# EAGLE board music bord (EAGLE 9.6.2)
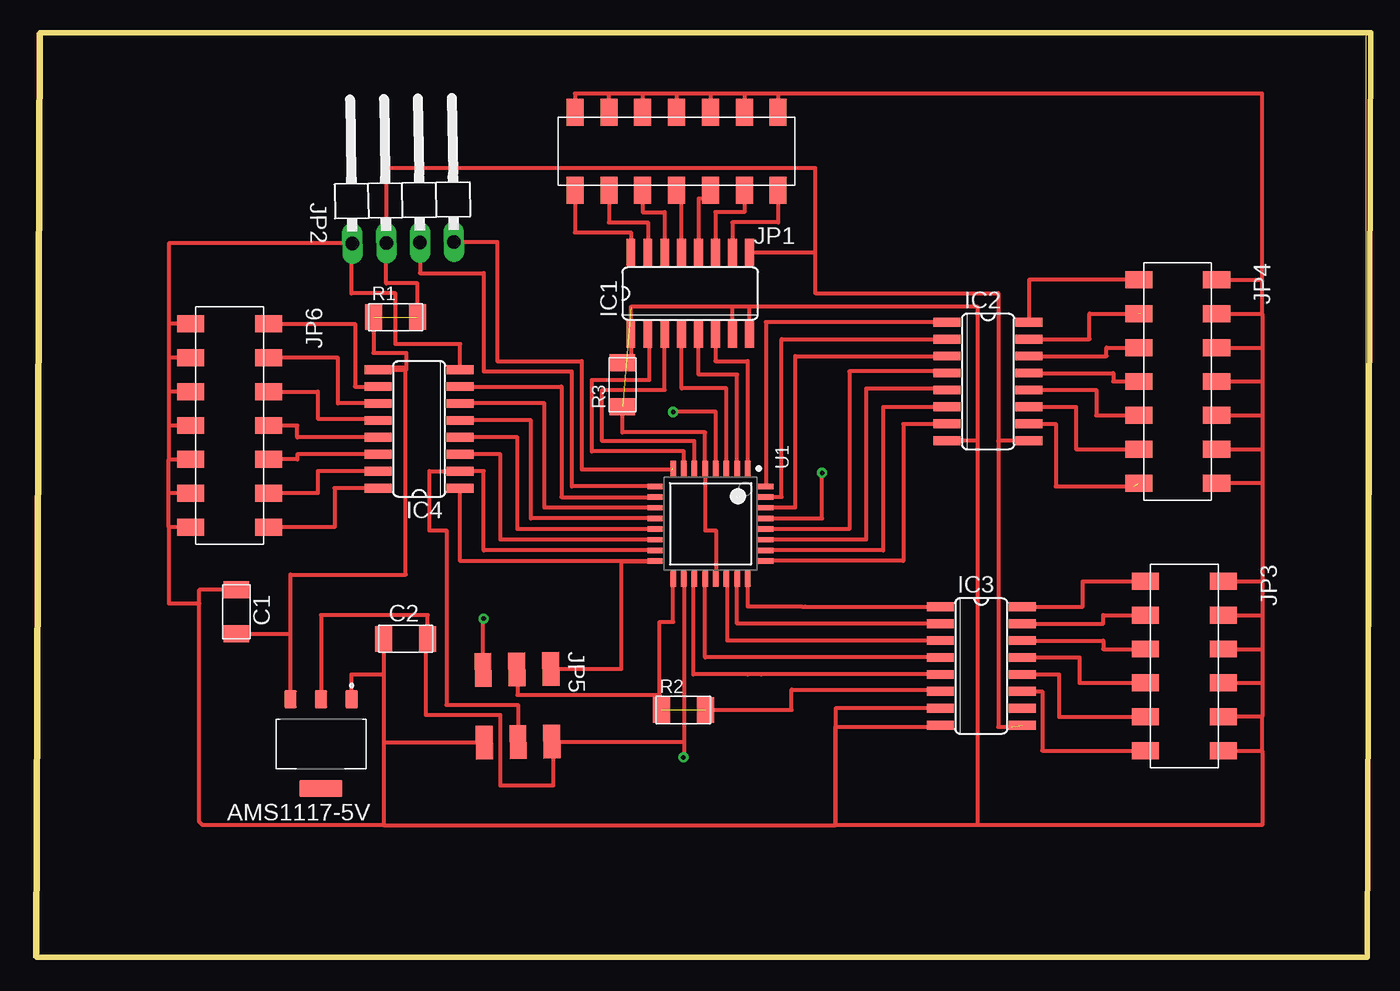
[diagram p0: board, top side]
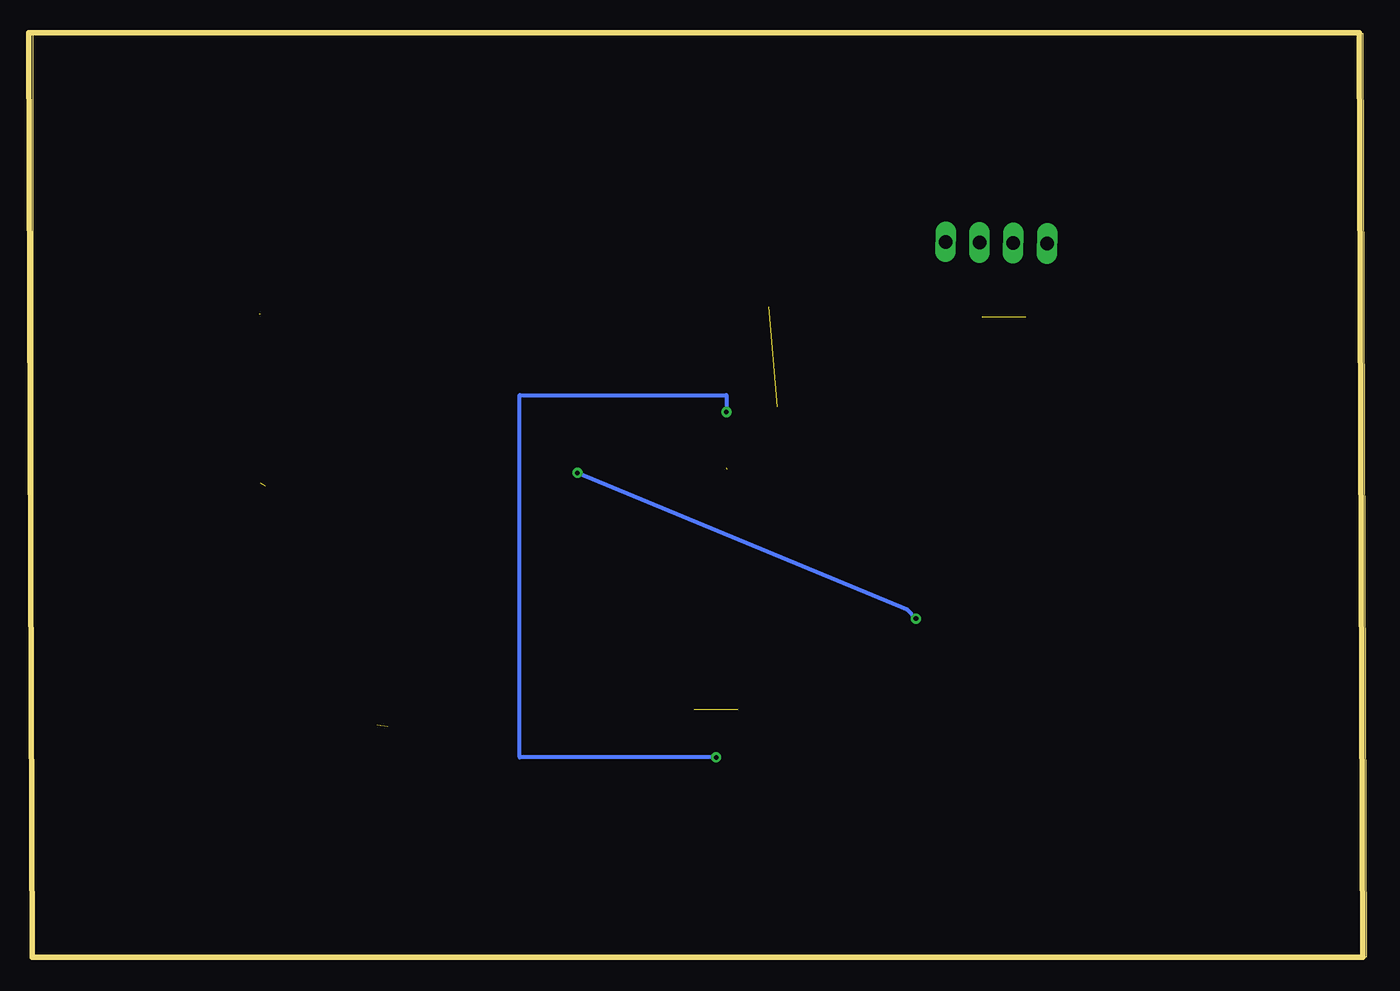
[diagram p1: board, bottom side, seen from below]

Size 100 x 69.29 mm. Coordinates in mm from the lower left corner, seen from the top.
Outline: 0,0 100,0 100,69.29 0.25,69.29 0,0
Copper layers (1*16): Top 0.035mm / dielectric 1.5mm / Bottom 0.035mm
Design rules "default *": minimum track width 12mil, minimum drill 0.35mm, track to track 12mil, track to pad 12mil, pad to pad 12mil, via to via 12mil, smd to smd 6mil, copper to edge 40mil, drill to drill 6mil, minimum pad ring 10mil, minimum via ring 8mil, stop-mask expansion 4mil, vias tented up to drill 0mil, thermal gap 10mil
Net classes: 0 default: clearance 0.205 mm
Milling: 4 lines

## Footprints (pad centres in the part's own frame; a part is rotated, then mirrored left to right if it is on the bottom)
SOT229P700X180-4N = smd 0.93 x 1.31: 1 -2.29,-3.345; 2 0,-3.345; 3 2.29,-3.345 | smd 3.24 x 1.31: 4 0,3.345
C1206FAB = smd 1.27 x 1.905: 1 -1.651,0; 2 1.651,0
SO16 = smd 0.66 x 2.032: 1 -4.445,-3.073; 2 -3.175,-3.073; 3 -1.905,-3.073; 4 -0.635,-3.073; 5 0.635,-3.073; 6 1.905,-3.073; 7 3.175,-3.073; 8 4.445,-3.073; 9 4.445,3.073; 10 3.175,3.073; 11 1.905,3.073; 12 0.635,3.073; 13 -0.635,3.073; 14 -1.905,3.073; 15 -3.175,3.073; 16 -4.445,3.073
2X07_SMT = smd 1.27 x 2.032: 1 -7.62,-2.921; 2 -7.62,2.921; 3 -5.08,-2.921; 4 -5.08,2.921; 5 -2.54,-2.921; 6 -2.54,2.921; 7 0,-2.921; 8 0,2.921; 9 2.54,-2.921; 10 2.54,2.921; 11 5.08,-2.921; 12 5.08,2.921; 13 7.62,-2.921; 14 7.62,2.921
1X04/90 = drill 1.016 long: 1 -3.81,-3.81; 2 -1.27,-3.81; 3 1.27,-3.81; 4 3.81,-3.81
2X06_SMT = smd 1.27 x 2.032: 1 -6.35,-2.921; 2 -6.35,2.921; 3 -3.81,-2.921; 4 -3.81,2.921; 5 -1.27,-2.921; 6 -1.27,2.921; 7 1.27,-2.921; 8 1.27,2.921; 9 3.81,-2.921; 10 3.81,2.921; 11 6.35,-2.921; 12 6.35,2.921
2X03SMD = smd 2.54 x 1.27: 1 -2.54,2.54; 2 2.92,2.54; 3 -2.54,0; 4 2.92,0; 5 -2.54,-2.54; 6 2.92,-2.54
R1206FAB = smd 1.27 x 1.905: 1 -1.651,0; 2 1.651,0
MICROCHIP_-_ATMEL_ATTINY88-AU_0 = smd 1.143 x 0.406: 1 -4.15,2.8; 2 -4.15,2; 3 -4.15,1.2; 4 -4.15,0.4; 5 -4.15,-0.4; 6 -4.15,-1.2; 7 -4.15,-2; 8 -4.15,-2.8; 17 4.15,-2.8; 18 4.15,-2; 19 4.15,-1.2; 20 4.15,-0.4; 21 4.15,0.4; 22 4.15,1.2; 23 4.15,2; 24 4.15,2.8 | smd 0.406 x 1.143: 9 -2.8,-4.15; 10 -2,-4.15; 11 -1.2,-4.15; 12 -0.4,-4.15; 13 0.4,-4.15; 14 1.2,-4.15; 15 2,-4.15; 16 2.8,-4.15; 25 2.8,4.15; 26 2,4.15; 27 1.2,4.15; 28 0.4,4.15; 29 -0.4,4.15; 30 -1.2,4.15; 31 -2,4.15; 32 -2.8,4.15

## Placement (x,y rotation side)
AMS1117-5V  AMS1117-3.3  [SOT229P700X180-4N]  21.59,16 180 top
C1  10 uF  [C1206FAB]  15.24,25.91 270 top
C2  1 uF  [C1206FAB]  27.94,23.88 0 top
IC1  ULN2003AD  [SO16]  49.28,49.78 0 top
IC2  ULN2003AD  [SO16]  71.63,43.18 270 top
IC3  ULN2003AD  [SO16]  71.12,21.84 270 top
IC4  ULN2003AD  [SO16]  28.96,39.62 90 top
JP1  [2X07_SMT]  48.26,60.45 180 top
JP2  [1X04/90]  27.69,57.4 0.9 top
JP3  [2X06_SMT]  86.36,21.84 270 top
JP4  [2X07_SMT]  85.85,43.18 270 top
JP5  [2X03SMD]  36.32,19.05 270.9 top
JP6  [2X07_SMT]  14.73,39.88 270 top
R1  [R1206FAB]  27.18,48.01 0 top
R2  [R1206FAB]  48.77,18.54 0 top
R3  [R1206FAB]  44.2,42.93 90 top
U1  MICROCHIP_-_ATMEL_ATTINY88-AUMICROCHIP_-_ATMEL_ATTINY88-AU_0_0  [MICROCHIP_-_ATMEL_ATTINY88-AU_0]  50.8,32.51 270 top

## Library data of the parts
AMS1117-5V = AMS1117-3.3; AVAILABILITY: In Stock; DESCRIPTION: Sot223/Pkg 1-Amp 3.3-Volt Low Drop Out Voltage Regulatator; MF: Advanced Monolithic Systems; MP: AMS1117-3.3; PACKAGE: SOT-223 Seeed Technology; PRICE: None
C1 C2 JP5 R1-R3 = fab
IC1-IC4 = uln-udn
JP1 JP3 JP4 JP6 = pinhead+
JP2 = pinhead
U1 = Atmel - ATTINY88-AU; CIIVA_IDS: 1155400; CODE__JEDEC: MS-026-ABA; COMPONENT_LINK_1_DESCRIPTION: Manufacturer URL; COMPONENT_LINK_1_URL: http://www.atmel.com/; COMPONENT_LINK_2_DESCRIPTION: ATtiny48/88 Datasheet; COMPONENT_LINK_2_URL: http://www.atmel.com/dyn/resources/prod_documents/doc8008.pdf; COMPONENT_LINK_3_DESCRIPTION: ATtiny48/88 Summary; COMPONENT_LINK_3_URL: http://www.atmel.com/dyn/resources/prod_documents/8008S.pdf; DATASHEET_VERSION: revC, Mar-2009; FOOTPRINT_VARIANT_NAME_0: Level C; FOOTPRINT_VARIANT_NAME_1: Level B; FOOTPRINT_VARIANT_NAME_2: Level A; IMPORTED: yes; IMPORTED_FROM: vault; IMPORT_TS: 1521843945; MF: Microchip / Atmel; MPN: ATTINY88-AU; PACKAGE: 32A; PACKAGE_DESCRIPTION: 32-Lead, 7x7x1.0 mm Body, 0.8mm Lead Pitch, Thin Profile Plastic Quad Flat Package (TQFP); PACKAGE_VERSION: revC, Oct-2010; PREFIX: U; RELEASE_DATE: 1329220623; VAULT_GUID: 2DDE0CE0-C8F3-4319-BD7A-FB53AA627F1B; VAULT_REVISION: 4BE95B8B-E1EF-4025-9FFB-95CA84512F43

## Nets
1: IC1.6 U1.1
2: IC1.5 U1.2
3: IC1.4 U1.3
5V: AMS1117-5V.2 C2.2 JP5.2 U1.4 U1.18
6: IC1.3 U1.6
7: IC1.2 U1.7
10: IC4.7 U1.10
11: IC4.6 U1.11
12: IC4.5 U1.12
13: IC4.4 U1.13
14: IC4.3 U1.14
19: IC3.5 U1.19
20: IC3.4 U1.20
22: IC3.3 U1.22
23: IC3.2 U1.23
24: IC3.1 U1.24
25: IC2.7 U1.25
26: IC2.6 U1.26
27: IC2.5 U1.27
28: IC2.4 U1.28
30: IC2.3 U1.30
31: IC2.2 U1.31
32: IC2.1 U1.32
GND: AMS1117-5V.1 C1.1 C2.1 IC1.1 IC1.7 IC1.8 IC2.8 IC3.7 IC3.8 IC4.8 JP1.1 JP1.3 JP1.5 JP1.7 JP1.9 JP1.11 JP1.13 JP2.1 JP3.2 JP3.4 JP3.6 JP3.8 JP3.10 JP3.12 JP4.2 JP4.4 JP4.6 JP4.8 JP4.10 JP4.12 JP4.14 JP5.6 JP6.1 JP6.3 JP6.5 JP6.7 JP6.9 JP6.11 JP6.13 R3.1 R3.2 U1.5 U1.21
MISO: IC4.1 JP5.1 U1.16
MOSI: IC4.2 JP5.4 U1.15
N$1: IC1.10 JP1.2
N$2: IC4.10 JP6.2
N$3: IC4.11 JP6.4
N$4: IC4.12 JP6.6
N$5: IC4.13 JP6.8
N$6: IC4.14 JP6.10
N$7: IC4.15 JP6.12
N$8: IC4.16 JP6.14
N$9: IC1.16 JP1.14
N$10: IC3.16 JP3.1
N$11: IC3.15 JP3.3
N$12: IC3.14 JP3.5
N$13: IC3.13 JP3.7
N$14: IC3.12 JP3.9
N$15: IC3.11 JP3.11
N$16: IC2.16 JP4.1
N$17: IC2.15 JP4.3
N$18: IC2.14 JP4.5
N$19: IC2.13 JP4.7
N$20: IC2.12 JP4.9
N$21: IC2.11 JP4.11
N$22: IC2.10 JP4.13
N$24: IC1.11 JP1.4
N$25: IC1.12 JP1.6
N$26: IC1.13 JP1.8
N$27: IC1.14 JP1.10
N$29: IC1.15 JP1.12
RESET: JP5.5 U1.29
RX: JP2.4 U1.8
SCK: IC3.6 JP5.3 R2.1 R2.2 U1.17
TX: JP2.3 U1.9
VCC: AMS1117-5V.3 C1.2 IC1.9 IC2.9 IC3.9 IC4.9 JP2.2 R1.1 R1.2

## Tracks (layer width: path | path; a pad name or v marks a point on that pad's centre or on a via)
1
  Top 0.305: U1.1 53.6,44.7 51.18,44.7 IC1.6
2
  Top 0.305: U1.2 52.8,43.69 49.91,43.69 IC1.5
3
  Top 0.305: IC1.4 48.64,42.67 52,42.67 U1.3
5V  (via drill 0.35)
  Top 0.305: AMS1117-5V.2 21.59,25.65 29.59,25.65 C2.2 29.46,23.88 29.46,18.16 35.05,18.16 35.05,12.87 39,12.87 39,16.07 JP5.2 48.8,16.17 | U1.18 48.8,16.17 | U1.4 51.2,40.89 v48.01,40.89 | v48.77,14.99 48.8,15.02 48.8,16.17
  Bottom 0.305: v48.77,14.99 63.5,14.99 63.5,42.16 48.01,42.16 v48.01,40.89
6
  Top 0.305: U1.6 49.6,38.71 42.67,38.71 42.67,42.55 47.37,42.55 IC1.3
7
  Top 0.305: U1.7 48.8,37.95 41.91,37.95 41.91,43.31 46.23,43.31 46.23,46.71 IC1.2
10
  Top 0.305: IC4.7 39.62,42.8 39.62,34.51 U1.10
11
  Top 0.305: U1.11 38.35,33.71 38.35,41.53 IC4.6
12
  Top 0.305: U1.12 37.34,32.91 37.34,40.26 IC4.5
13
  Top 0.305: U1.13 36.32,32.11 36.32,38.99 IC4.4
14
  Top 0.305: U1.14 35.05,31.31 35.05,37.72 IC4.3
19
  Top 0.305: IC3.5 54.61,21.21 53.59,21.21 49.53,21.21 49.53,28.36 U1.19
20
  Top 0.305: U1.20 50.4,22.48 IC3.4
22
  Top 0.305: IC3.3 52.07,23.75 52.07,28.36 U1.22
23
  Top 0.305: IC3.2 52.8,25.02 U1.23
24
  Top 0.305: IC3.1 57.91,26.29 57.66,26.29 53.6,26.29 U1.24
25
  Top 0.305: IC2.7 65.28,40.01 65.28,29.72 U1.25
26
  Top 0.305: IC2.6 63.75,41.27 63.75,30.51 U1.26
27
  Top 0.305: IC2.5 68.56,42.67 62.48,42.67 62.48,31.31 U1.27
28
  Top 0.305: U1.28 61.21,32.11 61.21,43.94 68.56,43.94 IC2.4
30
  Top 0.305: IC2.3 57.15,45.09 57.15,33.71 U1.30
31
  Top 0.305: IC2.2 56.13,46.35 56.13,34.51 U1.31
32
  Top 0.305: IC2.1 54.95,47.62 U1.32
GND  (1 unrouted)
  Top 0.305: 26.29,9.91 12.7,9.91 12.45,10.16 12.45,26.55 | JP6.13 10.16,32.26 | 10.16,32.26 10.16,26.55 12.45,26.55 | 12.45,26.55 12.45,27.56 C1.1 | AMS1117-5V.1 23.88,21.21 26.29,21.21 | 26.29,21.21 26.29,16.09 | 26.29,9.91 26.29,16.09 | 10.16,32.26 10.16,34.8 | JP6.11 10.16,34.8 | 10.16,34.8 10.16,37.34 | 10.16,37.34 JP6.9 | JP6.7 10.16,39.88 | 10.16,39.88 10.16,37.34 | JP6.5 10.16,42.42 | 10.16,42.42 10.16,39.88 | JP6.3 10.16,44.96 | 10.16,44.96 10.16,42.42 | JP6.1 10.16,47.5 | 10.16,47.5 10.16,44.96 | IC3.7 60.2,18.67 60.2,17.27 | 60.2,17.27 60.17,17.27 60.17,9.91 70.87,9.91 | 60.2,17.27 68.05,17.27 IC3.8 | 26.29,9.91 60.2,9.91 60.2,17.27 | 10.16,47.5 10.16,53.53 JP2.1 23.88,53.53 23.88,49.78 27.18,49.78 27.18,45.97 32.03,45.97 IC4.8 | JP3.12 92.2,15.49 | 92.2,15.49 92.2,18.03 | 92.2,18.03 JP3.10 | JP3.8 92.2,20.57 | 92.2,20.57 92.2,18.03 | JP3.6 92.2,23.11 | 92.2,23.11 92.2,20.57 | JP3.4 92.2,25.65 | 92.2,25.65 92.2,23.11 | JP3.2 92.2,28.19 | 92.2,28.19 92.2,25.65 | 92.2,35.56 JP4.14 | 92.2,35.56 92.2,28.19 | JP4.12 92.2,38.1 | 92.2,38.1 92.2,35.56 | JP4.8 92.2,43.18 | 92.2,43.18 92.2,40.64 | 92.2,40.64 92.2,38.1 | JP4.10 92.2,40.64 | JP4.6 92.2,45.72 | 92.2,45.72 92.2,43.18 | JP4.4 92.2,48.26 | 92.2,48.26 92.2,45.72 | JP4.2 92.2,50.8 | 92.2,48.26 92.2,50.8 | 92.2,15.49 92.2,9.91 70.87,9.91 | 70.87,9.91 70.87,38.73 | 70.87,38.73 IC2.8 | 70.87,38.73 70.87,48.77 53.72,48.77 | 52.45,48.77 44.83,48.77 IC1.1 44.83,44.58 R3.2 | 92.2,50.8 92.2,64.77 55.88,64.77 | 55.88,64.77 JP1.1 | 55.88,64.77 53.34,64.77 | 53.34,64.77 JP1.3 | 53.34,64.77 50.8,64.77 | 50.8,64.77 JP1.5 | 50.8,64.77 48.26,64.77 | 48.26,64.77 JP1.7 | 48.26,64.77 45.72,64.77 | 45.72,64.77 JP1.9 | 45.72,64.77 43.18,64.77
  Top 0.305: JP1.11 43.18,64.77 | 43.18,64.77 40.64,64.77 JP1.13 | JP5.6 26.29,16.09 | C2.1 26.29,21.21 | IC1.8 53.72,48.77 | 53.72,48.77 52.45,48.77 | IC1.7 52.45,48.77 | U1.21 51.2,32 50.4,32 U1.5 50.4,39.37 44.2,39.37 R3.1
MISO
  Top 0.305: IC4.1 32.03,29.71 U1.16 44.11,29.71 44.11,21.63 JP5.1
MOSI
  Top 0.305: U1.15 33.78,30.51 33.78,36.45 IC4.2 29.72,36.45 29.72,32 30.99,32 30.99,18.92 36.37,18.92 JP5.4
N$1
  Top 0.305: JP1.2 55.88,55.12 52.45,55.12 IC1.10
N$2
  Top 0.305: JP6.2 24.13,47.5 24.13,42.8 IC4.10
N$3
  Top 0.305: IC4.11 22.86,41.53 22.86,44.96 JP6.4
N$4
  Top 0.305: JP6.6 21.34,42.42 21.34,40.39 25.88,40.39 IC4.12
N$5
  Top 0.305: IC4.13 19.81,38.99 19.81,39.88 JP6.8
N$6
  Top 0.305: IC4.14 19.81,37.72 19.81,37.34 JP6.10
N$7
  Top 0.305: IC4.15 21.34,36.45 21.34,34.8 JP6.12
N$8
  Top 0.305: IC4.16 22.61,35.18 22.61,32.26 JP6.14
N$9
  Top 0.305: JP1.14 40.64,54.36 44.83,54.36 IC1.16
N$10
  Top 0.305: IC3.16 78.74,26.29 78.74,28.19 JP3.1
N$11
  Top 0.305: IC3.15 80.26,25.02 80.26,25.65 JP3.3
N$12
  Top 0.305: IC3.14 80.26,23.75 80.26,23.11 JP3.5
N$13
  Top 0.305: IC3.13 78.49,22.48 78.49,20.57 JP3.7
N$14
  Top 0.305: IC3.12 76.96,21.21 76.96,18.03 JP3.9
N$15
  Top 0.305: IC3.11 75.69,19.94 75.69,15.49 JP3.11
N$16
  Top 0.305: IC2.16 74.7,50.8 JP4.1
N$17  (1 unrouted)
  Top 0.305: IC2.15 79.25,46.35 79.25,48.26 83.06,48.26
N$18
  Top 0.305: IC2.14 80.52,45.09 80.52,45.72 JP4.5
N$19
  Top 0.305: 82.8,43.31 JP4.7 81.03,43.18 81.03,43.81 IC2.13
N$20
  Top 0.305: IC2.12 79.76,42.55 79.76,40.64 JP4.9
N$21
  Top 0.305: IC2.11 78.23,41.27 78.23,38.1 JP4.11
N$22  (1 unrouted)
  Top 0.305: IC2.10 76.71,40.01 76.71,35.31 82.55,35.31
N$24
  Top 0.305: JP1.4 53.34,55.88 51.18,55.88 IC1.11
N$25
  Top 0.305: JP1.6 50.8,56.9 49.91,56.9 IC1.12
N$26
  Top 0.305: IC1.13 48.64,56.9 48.26,56.9 JP1.8
N$27
  Top 0.305: JP1.10 45.72,55.88 47.37,55.88 IC1.14
N$29
  Top 0.305: JP1.12 43.18,55.12 46.1,55.12 IC1.15
RESET  (via drill 0.35)
  Top 0.305: U1.29 59.18,32.91 v59.18,36.32 | JP5.5 33.74,25.4 v33.78,25.4
  Bottom 0.305: v59.18,36.32 34.47,26.09 v33.78,25.4
RX  (1 unrouted)
  Top 0.305: 47.91,36.58 41.15,36.58 41.15,44.7 34.8,44.7 34.8,53.65 JP2.4
SCK  (1 unrouted)
  Top 0.305: 68.05,19.81 IC3.6 68.05,20.07 56.9,20.07 56.9,18.54 R2.2 | JP5.3 36.32,21.59 36.32,19.68 46.99,19.68 | U1.17 48,25.15 46.99,25.15 46.99,19.68 | 46.99,19.68 46.99,18.54 R2.1
TX
  Top 0.305: JP2.3 29.02,51.31 33.78,51.31 33.78,43.94 40.39,43.94 40.39,35.31 U1.9
VCC  (2 unrouted)
  Top 0.305: AMS1117-5V.3 19.3,24.26 | IC1.9 58.67,52.86 | 72.39,38.73 72.39,49.81 58.67,49.81 58.67,52.86 | 19.3,24.26 19.3,28.7 27.94,28.7 27.94,44.2 25.88,44.2 IC4.9 28,44.07 28,45.32 25.53,45.32 R1.1 | IC2.9 72.39,38.73 | 58.67,52.86 58.67,59.18 26.48,59.18 JP2.2 26.48,50.55 28.83,50.55 R1.2 | 73.41,17.27 72.39,17.27 72.39,38.73 | C1.2 19.3,24.26